# Altium PCB PCB1.PcbDoc
Units mil, origin at the board's own origin, x right, y up, seen from the top; angles counter-clockwise.
Board outline 6650 x 3735 mil, 2 copper layers (Top Layer, Bottom Layer); 26 components, 23 nets, 91 pads, 0 vias.
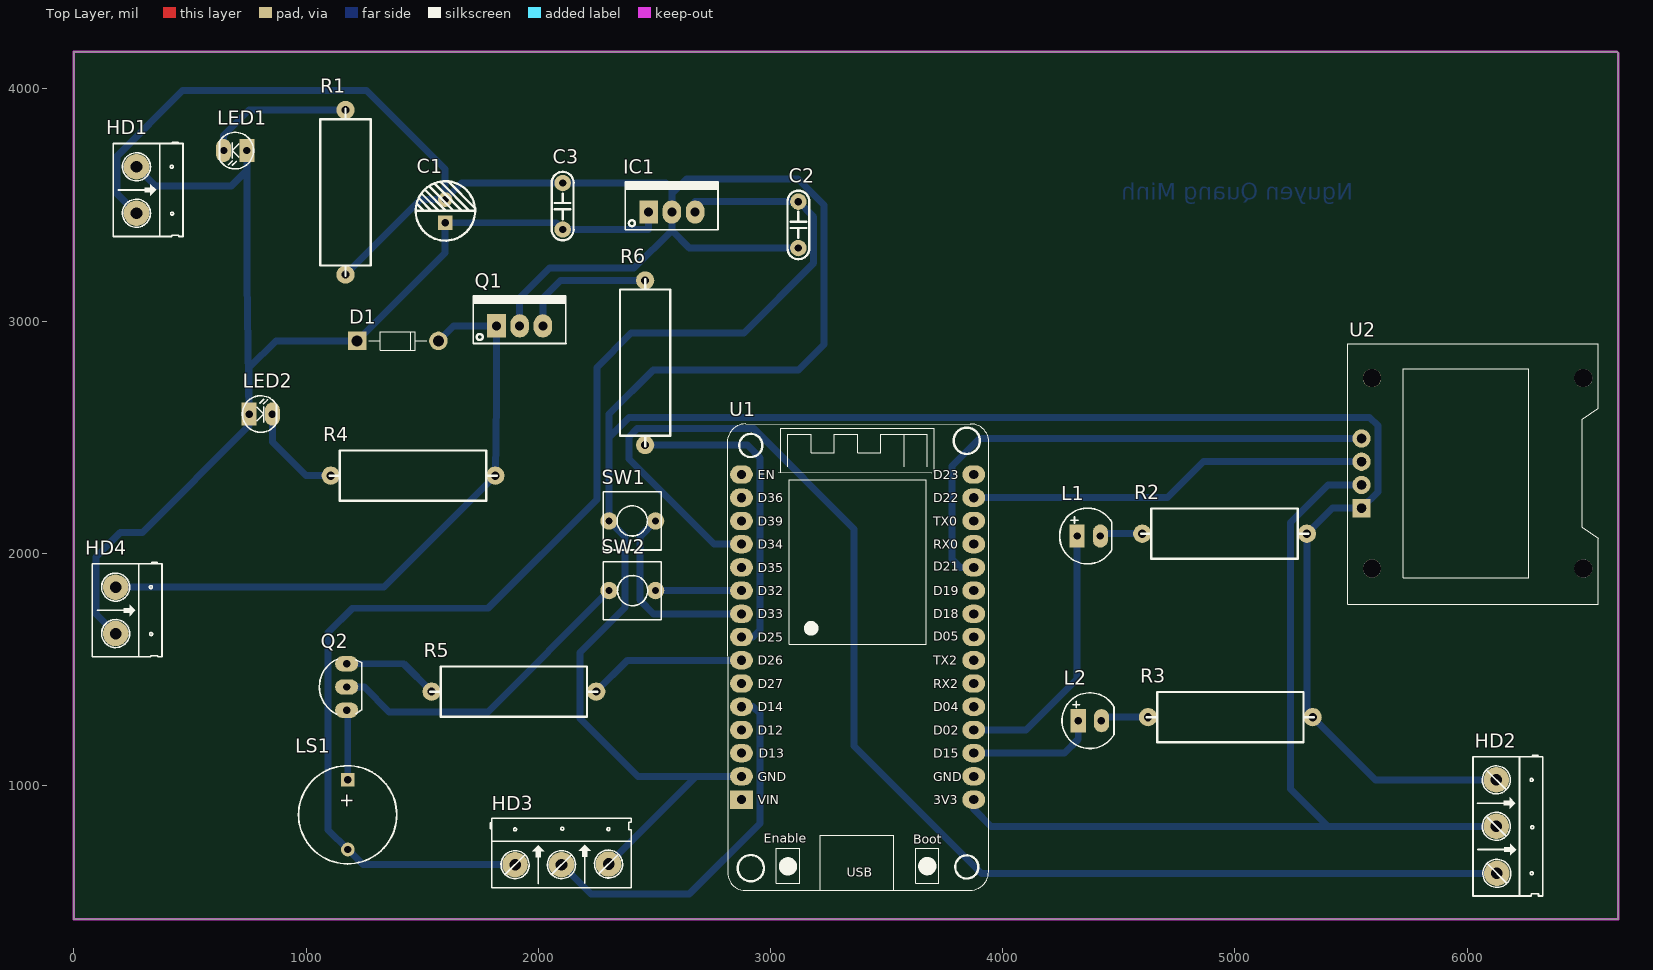
[diagram p0: Top Layer view]
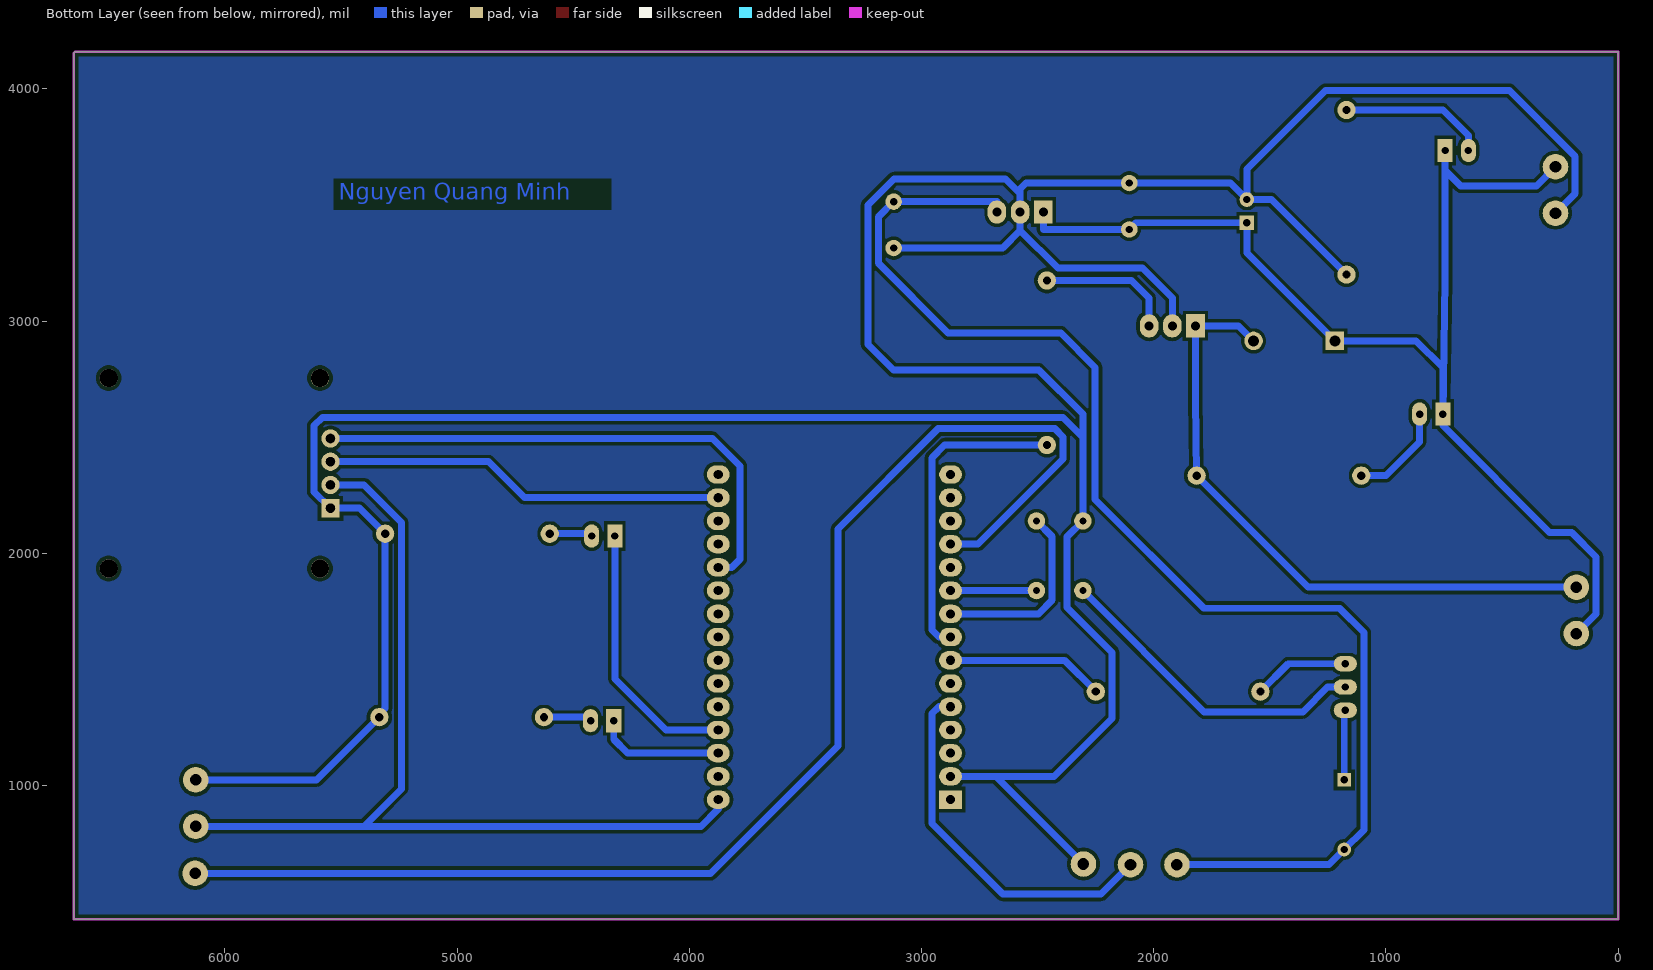
[diagram p1: Bottom Layer view, seen from below]
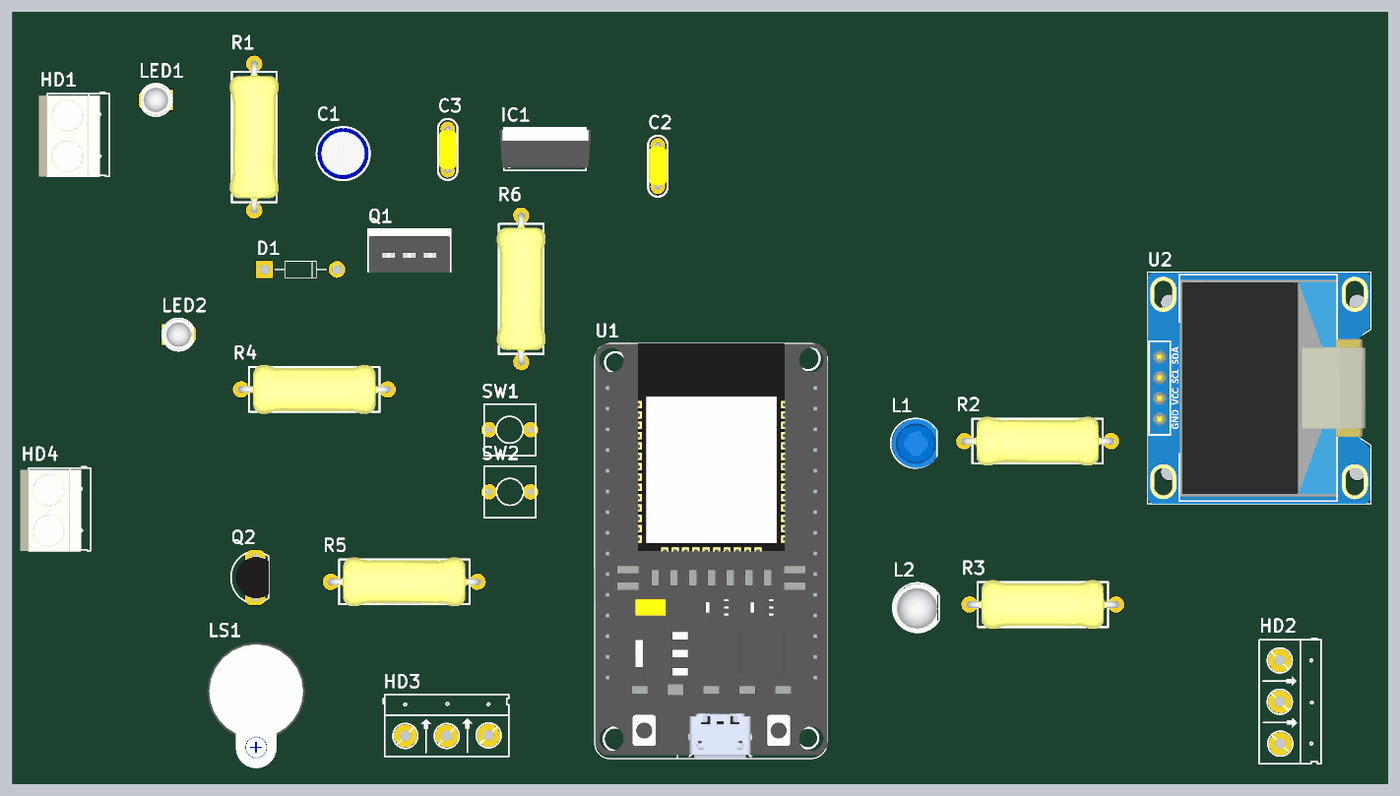
[diagram p2: 3D render of the assembled board from above, using the file's embedded part models]

## Layer stack, top to bottom
Top Solder: solder mask 0.4, Solder Resist, Dk 3.5
Top Layer: signal copper 1.4
Dielectric 1: dielectric 12.6, FR-4, Dk 4.8
Bottom Layer: signal copper 1.4
Bottom Solder: solder mask 0.4, Solder Resist, Dk 3.5

## Board outline
0,425 0,4160 6645,4160 6650,4155 6650,4140 6650,425

## Design rules (kind name [scope] priority, off if disabled: settings)
Clearance [All] p1: gap=15 ignorepadtopadclearanceinfootprint=FALSE
PolygonConnect [All] p1: connectstyle=Relief reliefconductorwidth=10 reliefentries=4 polygonreliefangle="90 Angle" airgapwidth=10
RoomDefinition Sheet1 [InComponentClass('Sheet1')] p1: confinementstyle=ConfineIn formatcopy=TRUE lockcomponents=FALSE outline 6882.5,1030 16522.5,1030 16522.5,3160 6882.5,3160
RoutingLayers [All] p1: top layer_v5=FALSE bottom layer_v5=TRUE
RoutingVias [All] p1: holewidth=28 width=50 viastyle="Through Hole" minholewidth=28 minwidth=50 maxholewidth=28 maxwidth=50
SolderMaskExpansion [All] p1: expansion=4 istentingtop=FALSE
Width [All] p1: maxlimit=40 minlimit=20 preferedwidth=30
29 further rules are at their usual default settings.

## Components (designator, comment, footprint, x,y, rotation, side; value= is the part's Value field where it differs from the comment)
C1 "100uF" "tu hoa 6.5mm" 1600,3475 r90 top
C2 "100nF" "tu tantalum dip5.08" 3120,3415 r270 top
C3 "330nF" "Tu tantalum dip5.08" 2105,3495 r90 top
D1 "100v" "DIODE 1A" 1220,2915 r0 top
HD1 "12VDC" HED2 270,3665 r270 top value="Header 2"
HD2 "Moisture" HED3 6125,1025 r270 top value="Header 3"
HD3 "DHT11" HED3 1900,660 r0 top value="Header 3"
HD4 "bom 12V" HED2 180,1855 r270 top value="Header 2"
IC1 "LM7805" QTO-220 2475,3470 r0 top
L1 "LED 5mm" LED-5MM-BLUE 4365,2075 r0 top
L2 "LED 5mm" LED-5MM-Yellow 4325,1280 r0 top
LED1 "LED" LED-3 745,3735 r180 top value="LED 3 ly Single Colour"
LED2 "LED" LED-3 755,2600 r0 top value="LED 3 ly Single Colour"
LS1 "Coi Chip Speaker" "Coi Chip Speacker" 1179.5,1025 r270 top
Q1 "IRF9540 DIP" TO220 1820,2980 r0 top
Q2 "BC547" TO92 1175,1425 r90 top value=C9014
R1 "1k" "tro vach 1w" 1170,3555 r90 top
R2 "1k" "tro vach 1w" 4955,2085 r0 top
R3 "1k" "tro vach 1w" 4980,1295 r0 top
R4 "1k" "tro vach 1w" 1460.67,2335 r180 top
R5 "1k" "tro vach 1w" 1895,1405 r180 top
R6 "1k" "tro vach 1w" 2460,2821.3 r90 top
SW1 "SW" SW2 2305,2140 r0 top value="SW chip 2 pin"
SW2 "SW" SW2 2505,1840 r180 top value="SW chip 2 pin"
U1 "ESP32_30" ESP32_30 3375,1640 r0 top
U2 "DISPLAY_OLED" DISPLAY_OLED 6022.5,2345 r90 top

## Footprints (in the part's own frame and the unit in brackets; to place one, negate y for a bottom-side part, rotate by r counter-clockwise, add the part's x,y. Pads: shape width x height; smd on the part's side, far side on the other; paste and mask are expansions set on the pad)
"Coi Chip Speacker" [mm]
  rect 1.5x1.5 hole 0.8: 1(0,0)
  round 1.5 hole 0.8: 2(7.62,0.013)
  silkscreen extent -1.55,-5.38 9.18,5.36, body extent -2.22,-6 13.24,6, height 4.5
"DIODE 1A" [mil]
  rect 80x80 hole 47.24: 1(0,0)
  round 80 hole 47.24: 2(350,0)
  silkscreen extent 50,-40 300,40
DISPLAY_OLED [mm]
  rect 2x2 hole 1: 1(-3.81,12.128)
  round 2 hole 1: 2(-1.27,12.128) 3(1.27,12.128) 4(3.81,12.128)
  round 2 hole 2 unplated: ""(-10.414,10.986) ""(-10.414,-12.128) ""(10.414,10.986) ""(10.414,-12.128)
  silkscreen extent -14.3,-13.78 14.15,13.66, body extent -14.28,-13.76 14.12,13.64, height 5.7
ESP32_30 [mm] "Microcontoller Board 30 Pins Wifi 2.4GHz BLE 4.2 ESP32-WROOM-32D"
  oval 2.5x2 hole 1: 1(-12.7,17.78) 2(-12.7,15.24) 3(-12.7,12.7) 4(-12.7,10.16) 5(-12.7,7.62) 6(-12.7,5.08) 7(-12.7,2.54) 8(-12.7,0) 9(-12.7,-2.54) 10(-12.7,-5.08) 11(-12.7,-7.62) 12(-12.7,-10.16) 13(-12.7,-12.7) 14(-12.7,-15.24) 16(12.7,17.78) 17(12.7,15.24) 18(12.7,12.7) 19(12.7,10.16) 20(12.7,7.62) 21(12.7,5.08) 22(12.7,2.54) 23(12.7,0) 24(12.7,-2.54) 25(12.7,-5.08) 26(12.7,-7.62) 27(12.7,-10.16) 28(12.7,-12.7) 29(12.7,-15.24) 30(12.7,-17.78)
  rect 2.5x2 hole 1: 15(-12.7,-17.78)
  silkscreen extent -14.23,-27.69 14.35,23.31, body extent -14.15,-27.61 14.35,23.29, height 7
HED2 [mil] "Header 2, 2 pin, hight 300mil, Pin to Pin 200, Colour Green"
  round 110 hole 50: 1(0,0) 2(200,0)
  silkscreen extent -106,-100 300,200, body extent -92,-140 302,155, height 394
HED3 [mil] "Header 3, 3 pin, hight 300mil, Pin to Pin 200, Colour Green"
  round 110 hole 50: 1(0,0) 2(200,0) 3(402.62,2.62)
  silkscreen extent -106,-100 500,200
LED-3 [mil] "LED 2 PIN, 3ly Only colour"
  rect 65x100 hole 32: 1(0,0)
  oval 65x100 hole 32: 2(100,0)
  silkscreen extent -29,-78 118,79, body extent -25,-75 113,75, height 217
LED-5MM-BLUE [mil] "LED 2 PIN, 5 ly , Only colour, pin to pin 110mil"
  rect 65x100 hole 32: 1(-45,0)
  oval 65x100 hole 32: 2(55,0)
  silkscreen extent -120,-120 104,120, body extent -113,-120 100,117, height 339
LED-5MM-Yellow [mil] "LED 2 PIN, 5 ly , Only colour,pin to pin 100mil"
  rect 65x100 hole 32: 1(0,0)
  oval 65x100 hole 32: 2(100,0)
  silkscreen extent -70,-120 154,120, body extent -67,-122 147,115, height 339
QTO-220 [mil] "TO-220 - 1-2-3"
  rect 80x100 hole 39: 1(0,0)
  oval 80x100 hole 39: 2(100,0) 3(200,0)
  silkscreen extent -100,-76 300,130, body extent -119,-64 322,121, height 755
SW2 [mil] "SW button 2pin, 250x 250 mil"
  round 75 hole 31: 1(0,0) 2(200,0)
  silkscreen extent -25,-125 225,125
TO92 [mil] "TO-92"
  oval 66x100 hole 32: 1(-100,0) 2(0,0) 3(100,0)
  silkscreen extent -117,-65 120,118, body extent -109,-66 109,95, height 245
TO220 [mil] "TO-220"
  rect 80x100 hole 39: 1(0,0)
  oval 80x100 hole 39: 2(100,0) 3(200,0)
  silkscreen extent -100,-76 300,130, body extent -95,-80 295,97, height 323
"tro vach 1w" [mm]
  round 2 hole 0.9: 1(-9,0) 2(9,0)
  silkscreen extent -9.14,-2.75 9.14,2.75, body extent -9.29,-3 9.29,3, height 6.5
"tu hoa 6.5mm" [mm]
  rect 1.6x1.6 hole 0.8: 1(-1.295,0.025)
  round 1.6 hole 0.8: 2(1.245,0.025)
  silkscreen extent -3.25,-3.25 3.25,3.25, body extent -3.15,-3.15 3.2,3.2, height 14.55
"tu tantalum dip5.08" [mm]
  round 1.8 hole 0.8: 1(-2.54,0) 2(2.54,0)
  silkscreen extent -3.74,-1.2 3.76,1.2, body extent -2.82,-1.08 2.77,1.08, height 6.27
"Tu tantalum dip5.08" [mm]
  round 1.8 hole 0.8: 1(-2.54,0) 2(2.54,0)
  silkscreen extent -3.74,-1.2 3.76,1.2, body extent -2.82,-1.08 2.77,1.08, height 6.27

## Part data
C1: library part "Tu Hoa 100uF 35V 6x8", "Cắm", Chung_Loai=Cắm, Don_Vi=Con, Ma_Hang=MH006862, So_Chan=2, Ten_Linh_Kien="Tụ Hóa 100uF 35V"
C2: library part "Tu tantalum 100nF 50V 20% DIP5.08", "Cắm", Chung_Loai=Cắm, Don_Vi=Con, Ma_Hang=MH003955, So_Chan=2, Ten_Linh_Kien="Tụ tantalum 104-100nF 50V 20% DIP5.08 (sứ vàng)(10PCS)"
C3: library part "Tu tantalum 330nF 50V 20% DIP5.08", "Cắm", Chung_Loai=Cắm, Don_Vi=Con, Ma_Hang=MH003963, So_Chan=2, Ten_Linh_Kien="Tụ tantalum 334-330nF 50V 20% DIP5.08 (sứ vàng) (10PCS)"
D1: library part "Diode 1N4007", "Cắm", Chung_Loai=Cắm, Don_Vi=Con, Ma_Hang=MH001063, Ten_Linh_Kien="Diode 1N4007 1A (DIP)"
HD1 HD4: library part Hed2, "Header 2 (Green)"
HD2 HD3: library part Hed3, "Header 3 (Green)"
IC1: library part LM78xx, "On ap +, from + 5 to + 24VDC"
L1: library part "LED 5mm Xanh Duong", "Cắm", Chung_Loai=Cắm, Don_Vi=Con, Ma_Hang=MH008987, Ten_Linh_Kien="Led 5MM Xanh Dương Đục (1000c)"
L2: library part "LED 5mm Vang", "Cắm", Chung_Loai=Cắm, Don_Vi=Con, Ma_Hang=MH008968, Ten_Linh_Kien="Led 5MM Phủ Vàng (1000c)"
LED1 LED2: "LED Single colour Green and Red"
LS1: "Còi chip"
Q1: "P-Channel Power MOSFET", ComponentLink1Description="Manufacturer Link", ComponentLink1URL=http://www.irf.com/, ComponentLink2Description=Datasheet, ComponentLink2URL=http://www.irf.com/product-info/datasheets/data/irf9540.pdf, DatasheetVersion=PD-9.421C, LatestRevisionDate=17-Jul-2002, LatestRevisionNote="Re-released for DXP Platform.", Note="Pin 2 is electrically connected to pin 4.", PackageDescription="TO, Thru-Hole, Vertical, Heatsink Mounted; 3 In-Line Leads; Pitch 2.54 mm", PackageReference=TO-220AB, PackageVersion=Feb-1997, Published=8-Jun-2000, Publisher="Altium Limited"
Q2: library part C1815, "NPN transistor"
R1 R2 R3 R4 R5 R6: library part "Tro Vach 1W 5% 1k", "Cắm", Chung_Loai=Cắm, Don_Vi=Con, Ma_Hang=MH006397, So_Chan=2, Ten_Linh_Kien="Trở 5% 1w 1k"
SW1 SW2: library part SW2, "Switch button 2 pin"
U1: "Microcontoller Board 30 Pins Wifi 2.4GHz BLE 4.2 ESP32-WROOM-32D", ComponentLink1Description=Datasheet, ComponentLink1URL=https://www.mouser.com/datasheet/2/891/esp32_wroom_32d_esp32_wroom_32u_datasheet_en-1365844.pdf
U2: "Display Oled 128x64 0.96\" I2C."

## Nets (pads, with @x,y where several pads share a name; then routed paths per layer and width w, separated by ;. In a path a pad name is that pad's centre, name@x,y a point inside that pad or via, vN(x,y) a via of type N, cw(c..) or ccw(c..) an arc to the next point about the centre after c; other vN are vias at no path point)
3.3V: HD2.2 U1.30 U2.2 | length 4069.4
  Bottom Layer w30: U1.30 3875,900 3950,825 5400,825 ; U2.2 5400,2295 5239,2134 5239,986 5400,825 ; HD2.2 5400,825
5V: C2.1 HD3.1 IC1.3 LS1.2 | length 5581.8
  Bottom Layer w30: HD3.1 1245,660 LS1.2 1095,810 1095,1659 1200,1764 1784,1764 2252,2232 2252,2801 2400,2949 2885,2949 3186,3250 3186,3449 C2.1 2675,3515 IC1.3
G: D1.2 HD4.1 Q1.1 R4.1 | length 2755.8
  Bottom Layer w30: HD4.1 1335,1855 R4.1 1820,2663 Q1.1 1635,2980 D1.2
GND: C1.2 C2.2 C3.2 HD1.2 HD2.1 HD3.3 IC1.2 Q1.2 R1.1 R2.2 R3.2 SW1.1 U1.14 U2.1 | length 16171.3
  Bottom Layer w30: HD1.2 185,3550 185,3710 468,3993 1261,3993 1599,3655 C1.2 ; R1.1 1493.33,3524 C1.2 ; Q1.2 1920,3100 2049,3229 2412,3229 2575,3390 ; HD3.3 2680,1040 ; U1.14 2680,1040 ; C2.2 2650,3315 2575,3390 ; HD2.1 5604.33,1025 R3.2 5334.33,1308.19 5309.33,1333.19 R2.2 5419.33,2195 U2.1 5615,2265 5615,2550 5579,2586 2391,2586 2305,2500 ; C1.2 1670,3595 C3.2 2550,3595 2575,3570 2575,3550 ; 2305,2500 2305,2600 2495,2790 3121,2790 3231,2900 3231,3500 3118,3613 2638,3613 2575,3550 ; 2305,2500 SW1.1 2373,2072 2373,1768 2179,1574 2179,1290 2429,1040 2680,1040 ; 2575,3390 IC1.2 2575,3550
IO14: HD3.2 U1.11 | length 1598.4
  Bottom Layer w30: HD3.2 2227,533 2650,533 2955,838 2955,1310 2925,1340 U1.11
IO25: R6.1 U1.8 | length 1352.2
  Bottom Layer w30: R6.1 2900,2466.97 2955,2411.97 2955,1670 2925,1640 U1.8
IO26: R5.1 U1.9 | length 681.6
  Bottom Layer w30: R5.1 2384.33,1540 U1.9
IO32: SW2.1 U1.6 | length 370
  Bottom Layer w30: SW2.1 U1.6
IO33: SW1.2 U1.7 | length 831
  Bottom Layer w30: SW1.2 2437,2072 2437,1800 2497,1740 U1.7
IO34: HD2.3 U1.4 | length 5825.5
  Bottom Layer w30: U1.4 2756,2040 2390,2406 2390,2502 2425,2537 2928,2537 3360,2105 3360,1170 3907.62,622.38 HD2.3
NetC1_1: C1.1 C3.1 D1.1 HD1.1 HD4.2 IC1.1 LED1.1 LED2.1 | length 5322.7
  Bottom Layer w30: HD4.2 95,1740 95,1985 200,2090 295,2090 755,2550 LED2.1 ; HD1.1 352,3583 678,3583 745,3650 ; LED1.1 745,3650 ; IC1.1 2475,3395 C3.1 2076,3424 C1.1 1599,3294 D1.1 870,2915 755,2800 LED2.1 ; 745,3650 745,3178 LED2.1
NetL1_1: L1.1 U1.27 | length 1151.1
  Bottom Layer w30: U1.27 4100,1240 4320,1460 L1.1
NetL1_2: L1.2 R2.1 | length 190.7
  Bottom Layer w30: L1.2 4420,2085 R2.1
NetL2_1: L2.1 U1.28 | length 554.9
  Bottom Layer w30: U1.28 4265,1140 4325,1200 L2.1
NetL2_2: L2.2 R3.1 | length 215.7
  Bottom Layer w30: L2.2 4425,1295 R3.1
NetLED1_2: LED1.2 R1.2 | length 635.3
  Bottom Layer w30: LED1.2 645,3800 754.33,3909.33 R1.2
NetLED2_2: LED2.2 R4.2 | length 431.4
  Bottom Layer w30: LED2.2 855,2480 1000,2335 R4.2
NetLS1_1: LS1.1 Q2.1 | length 304.5
  Bottom Layer w30: Q2.1 1179.5,1325 LS1.1
NetQ1_3: Q1.3 R6.2 | length 591.3
  Bottom Layer w30: Q1.3 2020,3100 2095.63,3175.63 R6.2
NetQ2_2: Q2.2 SW2.2 | length 1390.5
  Bottom Layer w30: Q2.2 1251,1425 1358,1318 1783,1318 SW2.2
NetQ2_3: Q2.3 R5.2 | length 415.4
  Bottom Layer w30: Q2.3 1420.67,1525 R5.2
SCL: U1.17 U2.3 | length 1734.2
  Bottom Layer w30: U1.17 4710,2240 4865,2395 U2.3
SDA: U1.20 U2.4 | length 2321.4
  Bottom Layer w30: U1.20 3817,1940 3782,1975 3782,2377 3900,2495 U2.4
pads on no net: U1.1 U1.2 U1.3 U1.5 U1.10 U1.12 U1.13 U1.15 U1.16 U1.18 U1.19 U1.21 U1.22 U1.23 U1.24 U1.25 U1.26 U1.29 U2.

## Polygon pours and split planes (outlines as drawn)
no net on Bottom Layer "NONET_L02_P000" (solid, pour order 0): 0,4155 6645,4155 6650,4150 6650,425 0,425

## Keep-outs
Keep-Out Layer:
  lines w10: 6645,425 0,425 ; 6650,425 6650,4140 6650,4155 6645,4160 0,4160 0,425 ; 0,425 0,425

## Other copper
Bottom Layer:
  text "Nguyen Quang Minh" at 5510,3523.33 h70

## Text inside footprints (layer, text, board x,y; h text height)
LS1: Top Overlay "+" at 1151.5,969.5 h60 r270
U1: Top Overlay "Enable" at 2970,755 h39.37; Top Overlay "Boot" at 3615,750 h39.37; Top Overlay "USB" at 3327.77,608.1 h39.37; Top Overlay "EN" at 2945,2320 h39.37; Top Overlay "D23" at 3700,2320 h39.37; Top Overlay "D36" at 2945,2220 h39.37; Top Overlay "TX2" at 3700,1520 h39.37; Top Overlay "RX2" at 3700,1420 h39.37; Top Overlay "D15" at 3700,1120 h39.37; Top Overlay "D02" at 3700,1220 h39.37; Top Overlay "GND" at 3700,1020 h39.37; Top Overlay "D04" at 3700,1320 h39.37; Top Overlay "3V3" at 3700,920 h39.37; Top Overlay "D39" at 2945,2120 h39.37; Top Overlay "D12" at 2945,1220 h39.37; Top Overlay "VIN" at 2945,920 h39.37; Top Overlay "GND" at 2945,1020 h39.37; Top Overlay "D14" at 2945,1320 h39.37; Top Overlay "D27" at 2945,1420 h39.37; Top Overlay "D13" at 2950,1120 h39.37; Top Overlay "D26" at 2945,1520 h39.37; Top Overlay "D32" at 2945,1820 h39.37; Top Overlay "D34" at 2945,2020 h39.37; Top Overlay "D35" at 2945,1920 h39.37; Top Overlay "D33" at 2945,1720 h39.37; Top Overlay "D25" at 2945,1620 h39.37; Top Overlay "D19" at 3700,1820 h39.37; Top Overlay "D05" at 3700,1625 h39.37; Top Overlay "D18" at 3700,1720 h39.37; Top Overlay "D21" at 3700,1925 h39.37; Top Overlay "D22" at 3700,2220 h39.37; Top Overlay "TX0" at 3700,2120 h39.37; Top Overlay "RX0" at 3700,2020 h39.37